# EAGLE board circuitboard (EAGLE 7.6.0)

Size 73.58 x 203.09 mm. Coordinates in mm from the lower left corner, seen from the top.
Outline: 0,0 56.82,0 56.82,53.33 0,53.33 0,0
Copper layers (1*16): Top 0.035mm / dielectric 1.5mm / Bottom 0.035mm
Design rules "default": minimum track width 10mil, minimum drill 24mil, track to track 8mil, track to pad 8mil, pad to pad 8mil, via to via 8mil, smd to smd 8mil, copper to edge 40mil, drill to drill 8mil, minimum pad ring 10mil, minimum via ring 8mil, stop-mask expansion 4mil, vias tented up to drill 0mil, thermal gap 10mil

## Footprints (pad centres in the part's own frame; a part is rotated, then mirrored left to right if it is on the bottom)
2P-2.54-65/35MIL = drill 0.889 pad 1.651 square: 1 0,1.27 | drill 0.889 pad 1.651: 2 0,-1.27
1X3P-2.54-2.54-11.6-3.0-BLACK-MALE = drill 0.889 pad 1.651 square: 1 0,2.54 | drill 0.889 pad 1.651: 2 0,0; 3 0,-2.54
DIL16 = drill 0.813 long: 1 -8.89,-3.81; 2 -6.35,-3.81; 3 -3.81,-3.81; 4 -1.27,-3.81; 5 1.27,-3.81; 6 3.81,-3.81; 7 6.35,-3.81; 8 8.89,-3.81; 9 8.89,3.81; 10 6.35,3.81; 11 3.81,3.81; 12 1.27,3.81; 13 -1.27,3.81; 14 -3.81,3.81; 15 -6.35,3.81; 16 -8.89,3.81
ARDUINO_UNO = drill 1.016 pad 1.88: 0 63.5,50.8; 1 60.96,50.8; 2 58.42,50.8; 3 55.88,50.8; 3.3V 35.56,2.54; 4 53.34,50.8; 5 50.8,50.8; 5V 38.1,2.54; 6 48.26,50.8; 7 45.72,50.8; 8 41.656,50.8; 9 39.116,50.8; 10 36.576,50.8; 11 34.036,50.8; 12 31.496,50.8; 13 28.956,50.8; A0 50.8,2.54; A1 53.34,2.54; A2 55.88,2.54; A3 58.42,2.54; A4 60.96,2.54; A5 63.5,2.54; AREF 23.876,50.8; GND 26.416,50.8; GND. 43.18,2.54; GND.. 40.64,2.54; I/OREF 30.48,2.54; N/C 27.94,2.54; RESET 33.02,2.54; SCL 18.796,50.8; SDA 21.336,50.8; VIN 45.72,2.54 | hole 3.2: 66.04,7.62; 66.04,35.56; 15.24,50.8; 13.97,2.54

## Placement (x,y rotation side)
M3  [2P-2.54-65/35MIL]  5,35.48 0 top
M4  [2P-2.54-65/35MIL]  5,48.18 0 top
M5  [2P-2.54-65/35MIL]  5,60.88 0 top
M6  [2P-2.54-65/35MIL]  5,73.58 0 top
PING2  [1X3P-2.54-2.54-11.6-3.0-BLACK-MALE]  5,98.98 0 top
PING3  [1X3P-2.54-2.54-11.6-3.0-BLACK-MALE]  5,111.68 0 top
PING4  [1X3P-2.54-2.54-11.6-3.0-BLACK-MALE]  5,124.38 0 top
PING5  [1X3P-2.54-2.54-11.6-3.0-BLACK-MALE]  5,137.08 0 top
SERVO1  [1X3P-2.54-2.54-11.6-3.0-BLACK-MALE]  5,162.48 0 top
SERVO2  [1X3P-2.54-2.54-11.6-3.0-BLACK-MALE]  5,175.18 0 top
SERVO3  [1X3P-2.54-2.54-11.6-3.0-BLACK-MALE]  5,187.88 0 top
SERVO5  [1X3P-2.54-2.54-11.6-3.0-BLACK-MALE]  5,200.58 0 top
U4  [DIL16]  5,10.08 0 top
U5  [ARDUINO_UNO]  5,22.78 0 top
U6  [DIL16]  5,86.28 0 top
U7  [ARDUINO_UNO]  5,149.78 0 top

## Library data of the parts
M3-M6 PING2-PING5 SERVO1-SERVO3 SERVO5 U4-U7 = AUTODESK_CIRCUITS_BREADBOARD

## Nets
N$1: U4.2 U5.2
N$2: U4.7 U5.3
N$3: U4.10 U5.5
N$4: M5.1 U4.11
N$5: M5.2 U4.14
N$6: U4.15 U5.4
N$7: U5.6 U6.2
N$8: M4.2 U6.3
N$9: M4.1 U6.6
N$10: U5.7 U6.7
N$11: PING2.2 PING3.2 PING4.2 PING5.2 U4.1 U4.8 U4.9 U4.16 U5.5V U6.1 U6.8 U6.9 U6.16
N$12: U5.9 U6.10
N$13: M6.1 U6.11
N$14: PING2.1 PING3.1 PING4.1 PING5.1 U4.4 U4.5 U4.12 U4.13 U5.GND.. U6.4 U6.5 U6.12 U6.13
N$15: M6.2 U6.14
N$16: U5.8 U6.15
N$17: M3.1 U4.6
N$18: M3.2 U4.3
N$19: PING2.3 U5.10
N$20: PING4.3 U5.1
N$21: PING3.3 U5.0
N$22: PING5.3 U5.11
N$23: SERVO1.2 SERVO2.2 SERVO3.2 SERVO5.2 U7.5V
N$24: SERVO1.1 SERVO2.1 SERVO3.1 SERVO5.1 U7.GND..
N$25: SERVO3.3 U7.9
N$26: SERVO2.3 U7.8
N$27: SERVO5.3 U7.7
N$28: SERVO1.3 U7.6

## Tracks (layer width: path | path; a pad name or v marks a point on that pad's centre or on a via)
N$1  (1 unrouted)
N$2  (1 unrouted)
N$3  (1 unrouted)
N$4  (1 unrouted)
N$5  (1 unrouted)
N$6  (1 unrouted)
N$7  (1 unrouted)
N$8  (1 unrouted)
N$9  (1 unrouted)
N$10  (1 unrouted)
N$11  (12 unrouted)
N$12  (1 unrouted)
N$13  (1 unrouted)
N$14  (12 unrouted)
N$15  (1 unrouted)
N$16  (1 unrouted)
N$17  (1 unrouted)
N$18  (1 unrouted)
N$19  (1 unrouted)
N$20  (1 unrouted)
N$21  (1 unrouted)
N$22  (1 unrouted)
N$23  (4 unrouted)
N$24  (4 unrouted)
N$25  (1 unrouted)
N$26  (1 unrouted)
N$27  (1 unrouted)
N$28  (1 unrouted)